# Altium PCB AGES_PBC.PcbDoc (part 1 of 2)
Units mm, origin at the board's own origin, x right, y up, seen from the top; angles counter-clockwise.
Board outline 190.75 x 141.73 mm, 2 copper layers (Top Layer, Bottom Layer), stack 1.671 mm thick; 38 components, 91 nets, 308 pads, 187 vias.
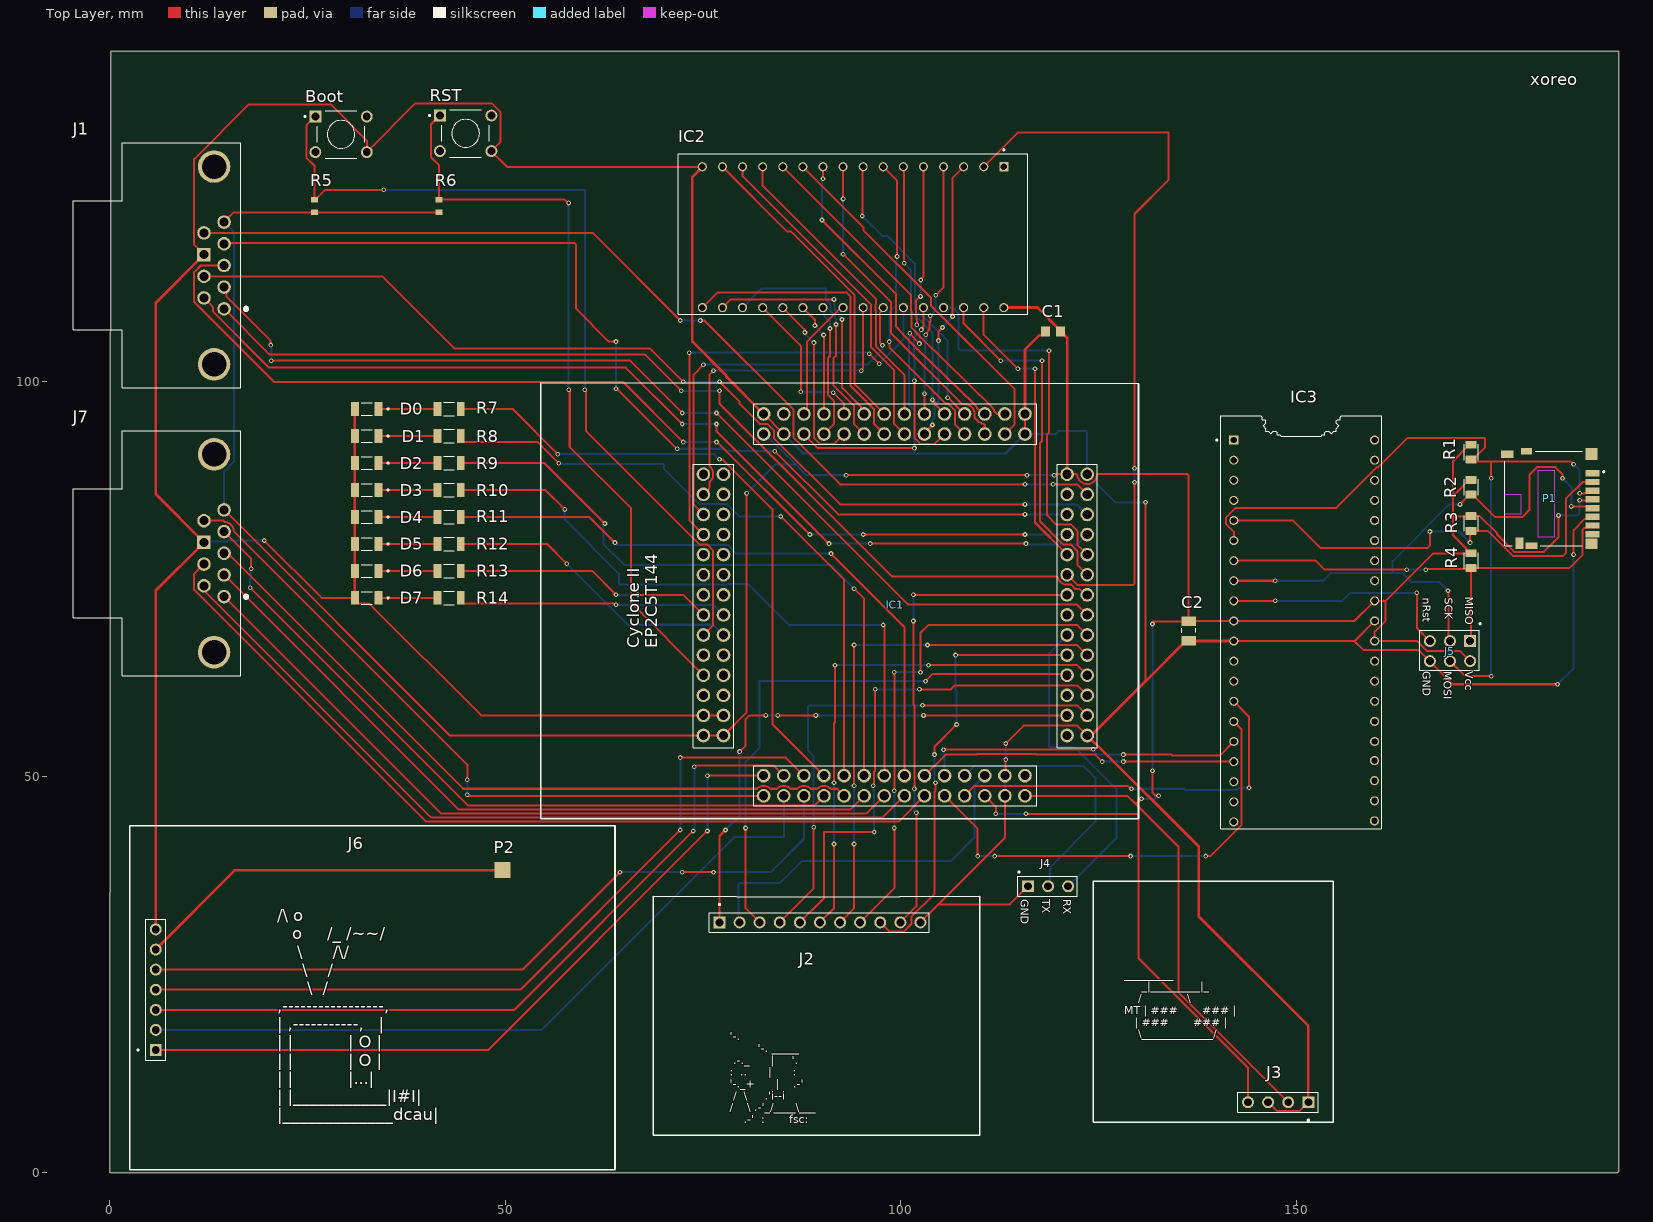
[diagram p0: Top Layer view]
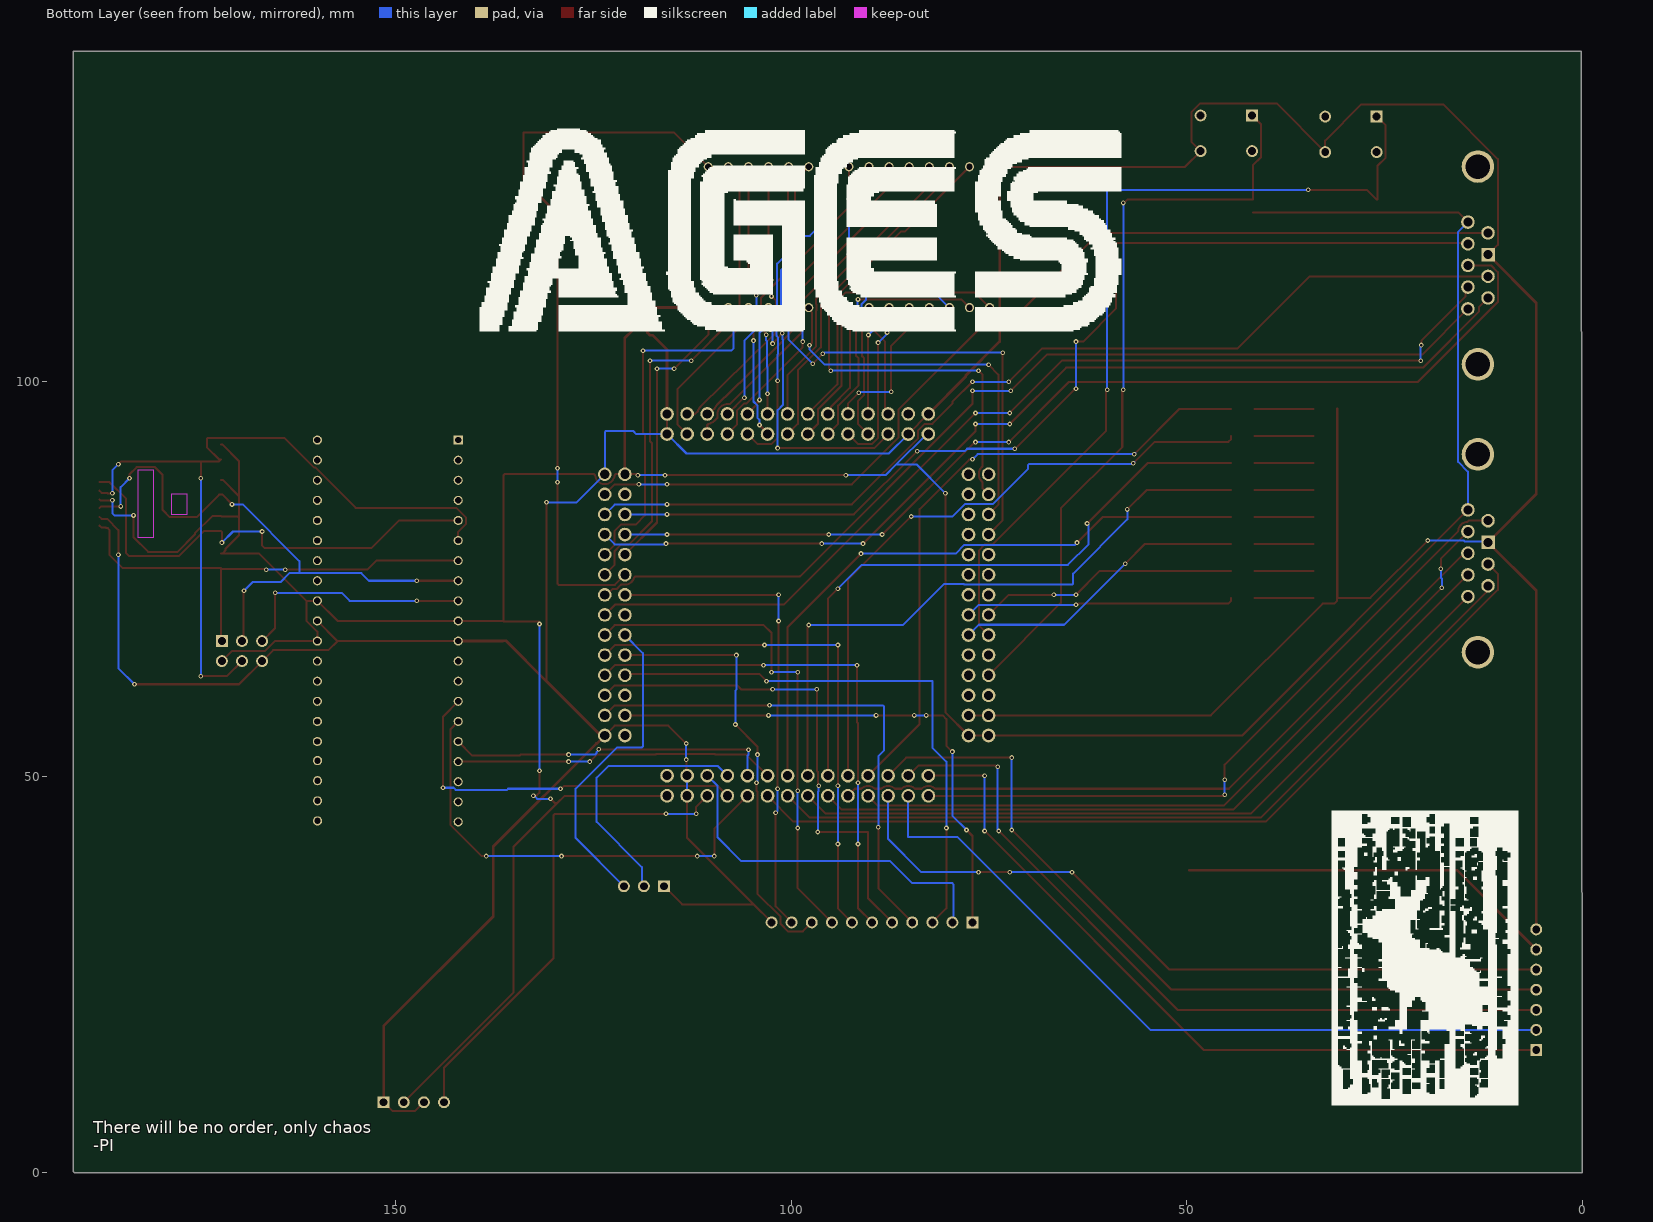
[diagram p1: Bottom Layer view, seen from below]
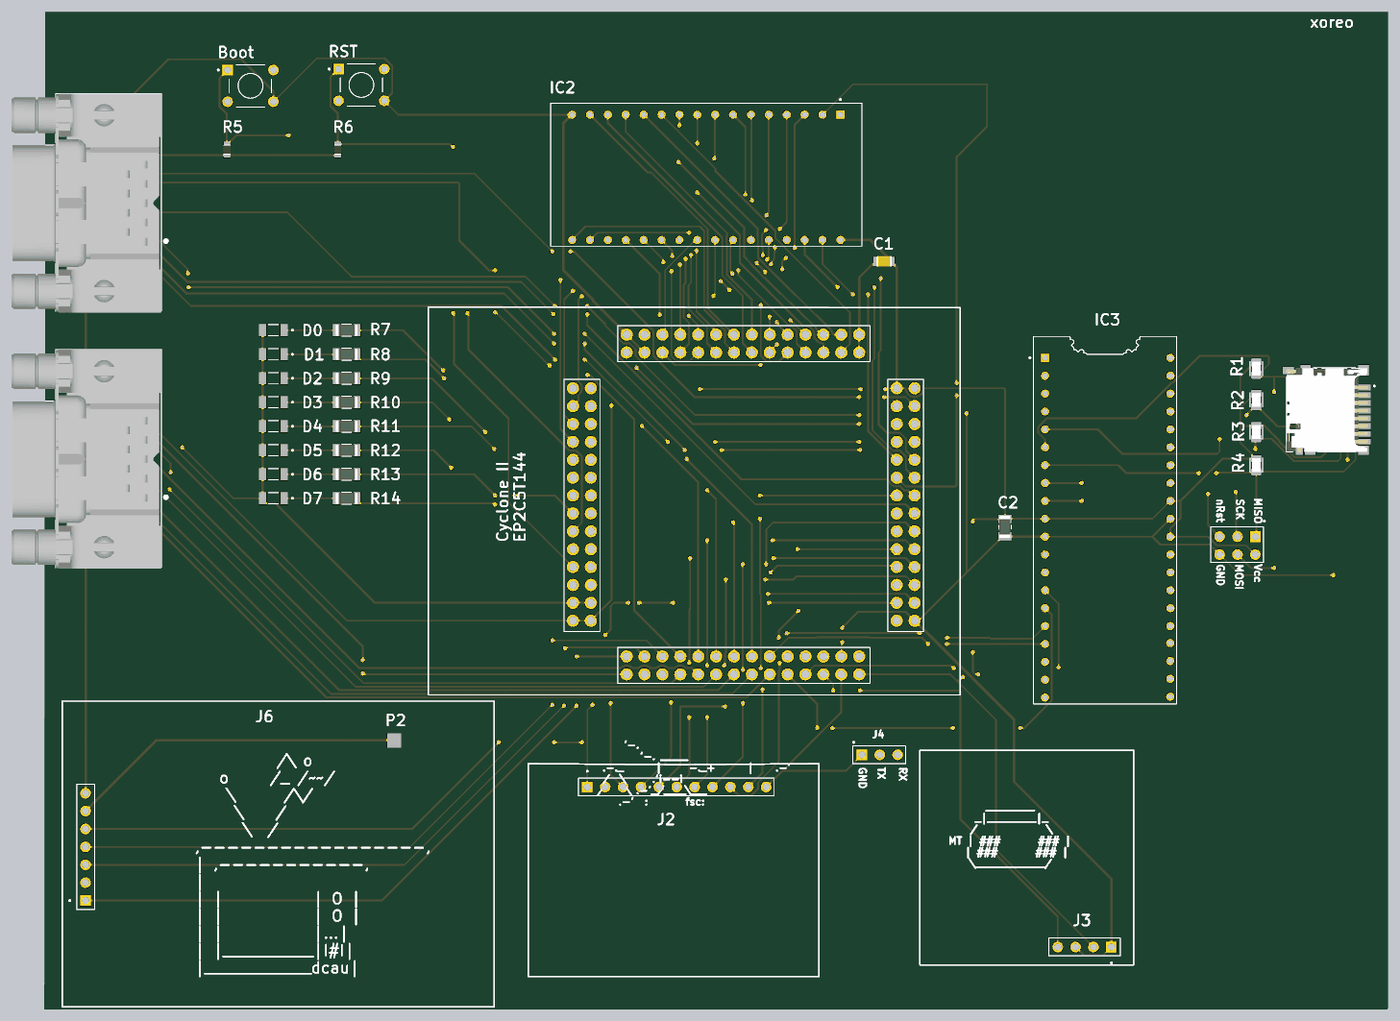
[diagram p2: 3D render of the assembled board from above, using the file's embedded part models]

## Layer stack, top to bottom
Top Solder: solder mask 0.0102, Solder Resist, Dk 3.5
Top Layer: signal copper 0.0356
Dielectric 1: dielectric 1.6, FR-4, Dk 4.8
Bottom Layer: signal copper 0.0356
Bottom Solder: solder mask 0.0102, Solder Resist, Dk 3.5

## Board outline
0,0 190.627,0 190.754,0.127 190.754,141.732 0.127,141.732

## Design rules (kind name [scope] priority, off if disabled: settings)
Clearance [All] p1: gap=0.254 ignorepadtopadclearanceinfootprint=FALSE except(0: Arc-Hole Track-Hole SMDPad-Hole THPad-Hole Via-Hole Fill-Hole Poly-Hole Region-Hole Text-Hole)
PolygonConnect [All] p1: connectstyle=Relief reliefconductorwidth=0.254 reliefentries=4 polygonreliefangle="90 Angle" airgapwidth=0.254
RoomDefinition RAMConnection [InComponentClass('RAMConnection')] p1: confinementstyle=ConfineIn formatcopy=TRUE lockcomponents=FALSE outline 67.818,102.616 122.301,102.616 122.301,130.429 67.818,130.429
RoomDefinition DebugLEDs [InComponentClass('DebugLEDs')] p2: confinementstyle=ConfineIn formatcopy=TRUE lockcomponents=FALSE outline 28.448,69.977 52.959,69.977 52.959,98.933 28.448,98.933
RoomDefinition CompositeConnection [InComponentClass('CompositeConnection')] p3: confinementstyle=ConfineIn formatcopy=TRUE lockcomponents=FALSE outline 3.175,13.716 7.62,13.716 7.62,35.179 3.175,35.179
RoomDefinition VGAConnection [InComponentClass('VGAConnection')] p4: confinementstyle=ConfineIn formatcopy=TRUE lockcomponents=FALSE outline 75.311,34.29 75.311,29.845 106.68,29.845 106.68,34.29
RoomDefinition SDConnection [InComponentClass('SDConnection')] p5: confinementstyle=ConfineIn formatcopy=TRUE lockcomponents=FALSE outline 134.102,42.926 189.103,42.926 189.103,98.679 134.102,98.679
RoutingVias [All] p1: holewidth=0.711 width=1.27 viastyle="Through Hole" minholewidth=0.711 minwidth=1.27 maxholewidth=0.711 maxwidth=1.27
SolderMaskExpansion [All] p1: expansion=0.102 istentingtop=FALSE
Width [All] p1: maxlimit=0.5 minlimit=0.254 preferedwidth=0.254 minimp=50.000000 maximp=50.000000 favimp=50.000000
30 further rules are at their usual default settings.

## Classes and differential pairs
component class VGAConnection: J2
component class SDConnection: C2 IC3 J5 P1 R1 R2 R3 R4
component class RAMConnection: C1 IC2
component class MainBoard: Boot IC1 J1 J3 J4 J7 P2 R5 R6 RST
component class DebugLEDs: D0 D1 D2 D3 D4 D5 D6 D7 R7 R8 R9 R10 R11 R12 R13 R14
component class CompositeConnection: J6

## Components (designator, comment, footprint, x,y, rotation, side; value= is the part's Value field where it differs from the comment)
Boot "Button" Button 26.012,133.477 r0 top
C1 "220nF" C0805C224K5RACTU 119.253,106.299 r0 top
C2 "100nF" "CAPACITOR 1206" 136.398,68.453 r270 top
D0 "LEDG" LEDC3216X120N 32.512,96.52 r180 top
D1 "LEDG" LEDC3216X120N 32.512,93.091 r180 top
D2 "LEDG" LEDC3216X120N 32.512,89.681 r180 top
D3 "LEDG" LEDC3216X120N 32.512,86.273 r180 top
D4 "LEDG" LEDC3216X120N 32.512,82.863 r180 top
D5 "LEDG" LEDC3216X120N 32.512,79.455 r180 top
D6 "LEDG" LEDC3216X120N 32.512,76.046 r180 top
D7 "LEDG" LEDC3216X120N 32.512,72.637 r180 top
IC1 "FPGA: CycloneII-EP2C5T144" "Cyclone II" 99.314,71.755 r90 top
IC2 "External memory DIP32" "DIP32 HDR" 113.03,127.127 r270 top
IC3 "ATmega 324 DIP" "DIP40 HDR" 150.993,68.453 r0 top
J1 "DB9 Sega controller connector" "DB9 Connector" 14.478,109.174 r270 top
J2 "VGA Pin HDR" "VGA HDR" 89.789,31.623 r0 top
J3 "4 pin header" "4 HDR" 147.701,8.89 r180 top
J4 "Connector: 1x3 Pin HDR" "3 HDR" 118.618,36.195 r0 top
J5 "2x3 male pin header" "2X3 HDR" 171.958,67.183 r180 top
J6 "Connector: 1x7 PIN HDR" "7 HDR" 7.112,32.004 r90 top
J7 "DB9 Sega controller connector" "DB9 Connector" 14.478,72.798 r270 top
P1 "SD slot DM3D" "SD SLOT" 187.445,85.186 r90 top
P2 "5VoltPad" 5VoltPad 49.657,38.227 r0 top
R1 "10K" "RESISTOR 0805" 172.085,91.059 r90 top
R2 "10K" "RESISTOR 0805" 172.085,86.614 r90 top
R3 "10K" "RESISTOR 0805" 172.085,82.042 r90 top
R4 "10K" "RESISTOR 0805" 172.085,77.343 r90 top
R5 "4K7 R" "Resistor 0603" 25.908,122.174 r270 top
R6 "4K7 R" "Resistor 0603" 41.656,122.174 r270 top
R7 "200R 1206" "Resistor 1206" 42.926,96.52 r180 top
R8 "200R 1206" "Resistor 1206" 42.926,93.091 r180 top
R9 "200R 1206" "Resistor 1206" 42.926,89.681 r180 top
R10 "200R 1206" "Resistor 1206" 42.926,86.273 r180 top
R11 "200R 1206" "Resistor 1206" 42.926,82.863 r180 top
R12 "200R 1206" "Resistor 1206" 42.926,79.455 r180 top
R13 "200R 1206" "Resistor 1206" 42.926,76.046 r180 top
R14 "200R 1206" "Resistor 1206" 42.926,72.637 r180 top
RST "Button" Button 41.76,133.604 r0 top

## Footprints (in the part's own frame and the unit in brackets; to place one, negate y for a bottom-side part, rotate by r counter-clockwise, add the part's x,y. Pads: shape width x height; smd on the part's side, far side on the other; paste and mask are expansions set on the pad)
"2X3 HDR" [mm] "2x3 pin header"
  rect 1.508x1.508 hole 1: 1(0,0)
  round 1.508 hole 1: 2(0,2.54) 3(2.54,0) 4(2.54,2.54) 5(5.08,0) 6(5.08,2.54)
  silkscreen extent -1.37,-2.29 6.35,3.66
"3 HDR" [mm] "1x3 pin header"
  rect 1.508x1.508 hole 1: 1(-2.54,0)
  round 1.508 hole 1: 2(0,0) 3(2.54,0)
  silkscreen extent -3.81,-1.27 3.68,1.88
"4 HDR" [mm] "1x4 pin header"
  rect 1.508x1.508 hole 1: 1(-3.81,0)
  round 1.508 hole 1: 2(-1.27,0) 3(1.27,0) 4(3.81,0)
  silkscreen extent -5.08,-1.27 5.08,2.35
5VoltPad [mm]
  rect 2x2 smd: 1(0,0)
"7 HDR" [mm] "1x7 pin header"
  rect 1.508x1.508 hole 1: 1(-16.51,1.27)
  round 1.508 hole 1: 2(-13.97,1.27) 3(-11.43,1.27) 4(-8.89,1.27) 5(-6.35,1.27) 6(-3.81,1.27) 7(-1.27,1.27)
  silkscreen extent -17.78,0 0,3.62
Button [mm]
  rect 1.498x1.498 / inner round 1.498 / far side rect 1.498x1.498 hole 0.99: 1(0,0)
  round 1.498 hole 0.99: 2(6.5,0) 3(0,-4.5) 4(6.5,-4.5)
  silkscreen extent -1.42,-5.25 6.24,0.74
C0805C224K5RACTU [mm] "C0805C224K5RACTU - 0805 SMD Capacitor"
  rect 1.1x1.3 smd: 1(-0.95,0) 2(0.95,0)
  body extent -1.1,-0.72 1.1,0.72, height 1.4
"CAPACITOR 1206" [mm] "100nF & 4.7pF"
  rect 1.16x1.82 smd: 1(-1.23,0) 2(1.23,0)
  silkscreen extent -0.32,-0.9 0.2,0.9, body extent -1.73,-0.8 1.47,0.8, height 0.85
"Cyclone II" [mm] "Cyclone II - EP2C5T144"
  round 1.725 hole 1.15: 1(16.51,24.257) 2(16.51,21.717) 3(13.97,24.257) 4(13.97,21.717) 5(11.43,24.257) 6(11.43,21.717) 7(8.89,24.257) 8(8.89,21.717) 9(6.35,24.257) 10(6.35,21.717) 11(3.81,24.257) 12(3.81,21.717) 13(1.27,24.257) 14(1.27,21.717) 15(-1.27,24.257) 16(-1.27,21.717) 17(-3.81,24.257) 18(-3.81,21.717) 19(-6.35,24.257) 20(-6.35,21.717) 21(-8.89,24.257) 22(-8.89,21.717) 23(-11.43,24.257) 24(-11.43,21.717) 25(-13.97,24.257) 26(-13.97,21.717) 27(-16.51,24.257) 28(-16.51,21.717) 29(-24.13,16.637) 30(-21.59,16.637) 31(-24.13,14.097) 32(-21.59,14.097) 33(-24.13,11.557) 34(-21.59,11.557) 35(-24.13,9.017) 36(-21.59,9.017) 37(-24.13,6.477) 38(-21.59,6.477) 39(-24.13,3.937) 40(-21.59,3.937) 41(-24.13,1.397) 42(-21.59,1.397) 43(-24.13,-1.143) 44(-21.59,-1.143) 45(-24.13,-3.683) 46(-21.59,-3.683) 47(-24.13,-6.223) 48(-21.59,-6.223) 49(-24.13,-8.763) 50(-21.59,-8.763) 51(-24.13,-11.303) 52(-21.59,-11.303) 53(-24.13,-13.843) 54(-21.59,-13.843) 55(-24.13,-16.383) 56(-21.59,-16.383) 57(16.51,-21.717) 58(16.51,-24.257) 59(13.97,-21.717) 60(13.97,-24.257) 61(11.43,-21.717) 62(11.43,-24.257) 63(8.89,-21.717) 64(8.89,-24.257) 65(6.35,-21.717) 66(6.35,-24.257) 67(3.81,-21.717) 68(3.81,-24.257) 69(1.27,-21.717) 70(1.27,-24.257) 71(-1.27,-21.717) 72(-1.27,-24.257) 73(-3.81,-21.717) 74(-3.81,-24.257) 75(-6.35,-21.717) 76(-6.35,-24.257) 77(-8.89,-21.717) 78(-8.89,-24.257) 79(-11.43,-21.717) 80(-11.43,-24.257) 81(-13.97,-21.717) 82(-13.97,-24.257) 83(-16.51,-21.717) 84(-16.51,-24.257) 85(24.13,16.637) 86(21.59,16.637) 87(24.13,14.097) 88(21.59,14.097) 89(24.13,11.557) 90(21.59,11.557) 91(24.13,9.017) 92(21.59,9.017) 93(24.13,6.477) 94(21.59,6.477) 95(24.13,3.937) 96(21.59,3.937) 97(24.13,1.397) 98(21.59,1.397) 99(24.13,-1.143) 100(21.59,-1.143) 101(24.13,-3.683) 102(21.59,-3.683) 103(24.13,-6.223) 104(21.59,-6.223) 105(24.13,-8.763) 106(21.59,-8.763) 107(24.13,-11.303) 108(21.59,-11.303) 109(24.13,-13.843) 110(21.59,-13.843) 111(24.13,-16.383) 112(21.59,-16.383)
  silkscreen extent -27.05,-30.73 28.07,44.83
"DB9 Connector" [mm] "DB9 Sega joystick connector"
  round 1.708 hole 1.14: 1(0,0) 2(-2.74,0) 3(-5.48,0) 4(-8.22,0) 5(-10.96,0) 6(-1.37,-2.54) 7(-4.11,-2.54) 9(-9.59,-2.54)
  rect 1.708x1.708 hole 1.14: 8(-6.85,-2.54)
  round 4.116 hole 3.1: S1(-17.98,-1.27) S2(7.02,-1.27)
  silkscreen extent -20.96,-19.07 10,2.97, body extent -20.93,-19.16 10.16,2.14, height 13.85
"DIP32 HDR" [mm]
  rect 1.15x1.15 / inner round 1.15 / far side rect 1.15x1.15 hole 0.8: 1(0,0)
  round 1.15 hole 0.8: 2(0,-2.54) 3(0,-5.08) 4(0,-7.62) 5(0,-10.16) 6(0,-12.7) 7(0,-15.24) 8(0,-17.78) 9(0,-20.32) 10(0,-22.86) 11(0,-25.4) 12(0,-27.94) 13(0,-30.48) 14(0,-33.02) 15(0,-35.56) 16(0,-38.1) 17(17.8,-38.1) 18(17.8,-35.56) 19(17.8,-33.02) 20(17.8,-30.48) 21(17.8,-27.94) 22(17.8,-25.4) 23(17.8,-22.86) 24(17.8,-20.32) 25(17.8,-17.78) 26(17.8,-15.24) 27(17.8,-12.7) 28(17.8,-10.16) 29(17.8,-7.62) 30(17.8,-5.08) 31(17.8,-2.54) 32(17.8,0)
  silkscreen extent -2.25,-41.15 18.67,3.05
"DIP40 HDR" [mm] "ATMega DIP40 socket"
  rect 1.15x1.15 / inner round 1.15 / far side rect 1.15x1.15 hole 0.8: 1(-8.9,24.13)
  round 1.15 hole 0.8: 2(-8.9,21.59) 3(-8.9,19.05) 4(-8.9,16.51) 5(-8.9,13.97) 6(-8.9,11.43) 7(-8.9,8.89) 8(-8.9,6.35) 9(-8.9,3.81) 10(-8.9,1.27) 11(-8.9,-1.27) 12(-8.9,-3.81) 13(-8.9,-6.35) 14(-8.9,-8.89) 15(-8.9,-11.43) 16(-8.9,-13.97) 17(-8.9,-16.51) 18(-8.9,-19.05) 19(-8.9,-21.59) 20(-8.9,-24.13) 21(8.88,-24.003) 22(8.88,-21.463) 23(8.88,-18.923) 24(8.88,-16.383) 25(8.9,-13.97) 26(8.9,-11.43) 27(8.9,-8.89) 28(8.9,-6.35) 29(8.9,-3.81) 30(8.9,-1.27) 31(8.9,1.27) 32(8.9,3.81) 33(8.9,6.35) 34(8.9,8.89) 35(8.9,11.43) 36(8.9,13.97) 37(8.9,16.51) 38(8.9,19.05) 39(8.9,21.59) 40(8.9,24.13)
  silkscreen extent -11.15,-25.02 9.77,27.18
LEDC3216X120N [mm]
  rect 1.01x1.73 smd: NEG(1.51,0) POS(-1.51,0)
  silkscreen extent -2.8,-0.8 0.68,0.8
"Resistor 0603" [mm] "PCF0603 SMD Resistor"
  rect 0.7x0.9 smd: 1(-0.8,0) 2(0.8,0)
  body extent -0.7,-0.5 0.7,0.5, height 0.65
"RESISTOR 0805" [mm]
  rrect25% 1x1.42 smd: 1(-0.935,0) 2(0.935,0)
  silkscreen extent -1,-0.89 1,0.89, body extent -1,-0.63 1,0.63, height 0.6
"Resistor 1206" [mm]
  rect 0.97x1.73 smd: 1(-1.48,0) 2(1.48,0)
  silkscreen extent -0.67,-0.85 0.67,0.85, body extent -1.55,-0.8 1.55,0.8, height 0.65
"SD SLOT" [mm]
  rect 0.8x1.75 smd: 1(3.2,0) 2(2.1,0) 3(1,0) 4(-0.1,0) 5(-1.2,0) 6(-2.3,0) 7(-3.4,0) 8(-4.5,0)
  rect 1.3x1.5 smd: S1(-5.7,0.125)
  rect 1.5x1.5 smd: S2(5.65,0.125)
  rect 0.8x1.5 smd: S3(-5.95,7.725)
  rect 0.8x1.4 smd: S4(6,8.375)
  rect 1x1.55 smd: SW-A(5.6,10.8)
  rect 1.45x1 smd: SW-B(-5.625,9.225)
  Keep-Out Layer region: 0.55,9.075 -1.95,9.075 -1.95,11.075 0.55,11.075
  Keep-Out Layer region: 3.6,4.875 -4.9,4.875 -4.9,6.875 3.6,6.875
  Keep-Out Layer region: 3.6,4.875 -4.9,4.875 -4.9,6.875 3.6,6.875
  Keep-Out Layer region: 0.55,9.075 -1.95,9.075 -1.95,11.075 0.55,11.075
  silkscreen extent -5.95,-1.5 6,11.07, body extent -5.98,-0.39 5.97,11.06, height 1.55
"VGA HDR" [mm] "1x11 pin header"
  rect 1.508x1.508 hole 1: 1(-12.7,0)
  round 1.508 hole 1: 2(-10.16,0) 3(-7.62,0) 4(-5.08,0) 5(-2.54,0) 6(0,0) 7(2.54,0) 8(5.08,0) 9(7.62,0) 10(10.16,0) 11(12.7,0)
  silkscreen extent -13.97,-1.27 13.84,2.35

## Part data
Boot RST: "50 mA SPST Round Actuator 160 Gram Force Tactile Pushbutton Switch", Package=None, Availability="In Stock", Check_prices=https://www.snapeda.com/parts/1825910-2/TE+Connectivity+ALCOSWITCH+Switches/view-part/?ref=eda, EU_RoHS_Compliance=Compliant, MF="TE Connectivity", MP=1825910-2, Price=None, Purchase-URL=https://pricing.snapeda.com/search/part/1825910-2/?ref=eda, SnapEDA_Link=https://www.snapeda.com/parts/1825910-2/TE+Connectivity+ALCOSWITCH+Switches/view-part/?ref=snap
C1: library part "Capacitor: 0.22µF", "0805 C 220nF Ceramic Multilayer Capacitor; 50 VDC; +125degC; X7R Dielec; +/-10%", Case Code (Imperial)=0805, Case Code (Metric)=2012, Dielectric=X7R, Dielectric Material=Ceramic, Manufacturer=KEMET, Manufacturer Part Number=C0805C224K5RACTU, Max Operating Temperature=125°C, Min Operating Temperature=-55°C, Package Quantity=1, Supplier Part Number 1=8029927, Tolerance=10%, Voltage=50V, Capacitance=220nF, Case/Package=0805, Category="Ceramic Capacitors", ComponentLink1Description=https://datasheet.ciiva.com/7842/kem-c1002-x7r-smd-7842582.pdf?src-supplier=Element14, ComponentLink1URL=https://datasheet.ciiva.com/7842/kem-c1002-x7r-smd-7842582.pdf?src-supplier=Element14, ComponentLink2Description=https://datasheet.ciiva.com/18193/getdatasheetpartid-304413-18193686.pdf?src-supplier=Verical, ComponentLink2URL=https://datasheet.ciiva.com/18193/getdatasheetpartid-304413-18193686.pdf?src-supplier=Verical, Construction=Flat, Depth=1.25mm, Dissipation Factor=2.5%, Height=1.1mm, Lead Pitch=0.75mm, Length=2mm, Mount="Surface Mount,PCB", Packaging="Tape and Reel", Pricing 1="500=0,04800, 2500=0,03900 (USD)", Radiation Hardening=No, REACH SVHC="No SVHC", RoHS=Yes, RoHS Compliant=Yes, Series=C, Stock 1=18500, Supplier 1=RSComponents, Termination=SMD/SMT, Thickness=0.055inch, Voltage Rating=50V, Voltage Rating (DC)=50V, Width=0.049inch
C2: library part "Capacitor: 100nF", "Ceramic capacitor SMD-1206 100nF /50V X7R# K +-10%, AVX, RoHS, /4000 reel/", Case Code (Imperial)=1206, Case Code (Metric)=3216, Dielectric=X7R, Dielectric Material=Ceramic, Insulation Resistance=100GR, Manufacturer="Kyocera AVX", Manufacturer Part Number=12065C104KAT2A, Max Operating Temperature=125°C, Min Operating Temperature=-55°C, Package Quantity=1, Supplier Part Number 1=2281081, Tolerance=10%, Voltage=50V, Capacitance=100nF, Case/Package=1206, Category="Ceramic Capacitors", ComponentLink1Description=https://datasheet.ciiva.com/11786/0900766b80ed4be2-11786988.pdf?src-supplier=Rs, ComponentLink1URL=https://datasheet.ciiva.com/11786/0900766b80ed4be2-11786988.pdf?src-supplier=Rs, ComponentLink2Description=https://datasheet.ciiva.com/2988/cx7r-2988135.pdf?src-supplier=Avnet, ComponentLink2URL=https://datasheet.ciiva.com/2988/cx7r-2988135.pdf?src-supplier=Avnet, ComponentLink3Description=https://datasheet.ciiva.com/16375/cx7r-16375719.pdf?src-supplier=Future+Electronics, ComponentLink3URL=https://datasheet.ciiva.com/16375/cx7r-16375719.pdf?src-supplier=Future+Electronics, ComponentLink4Description=https://datasheet.ciiva.com/2988/cx7r-2988136.pdf?src-supplier=Avnet, ComponentLink4URL=https://datasheet.ciiva.com/2988/cx7r-2988136.pdf?src-supplier=Avnet, ComponentLink5Description=https://datasheet.ciiva.com/7833/cx7r-7833405.pdf?src-supplier=Element14, ComponentLink5URL=https://datasheet.ciiva.com/7833/cx7r-7833405.pdf?src-supplier=Element14, ComponentLink6Description=https://datasheet.ciiva.com/25796/cx7r-25796358.pdf?src-supplier=Farnell, ComponentLink6URL=https://datasheet.ciiva.com/25796/cx7r-25796358.pdf?src-supplier=Farnell, ComponentLink7Description=https://datasheet.ciiva.com/7833/cx7r-7833402.pdf?src-supplier=Element14, ComponentLink7URL=https://datasheet.ciiva.com/7833/cx7r-7833402.pdf?src-supplier=Element14, ComponentLink8Description=https://datasheet.ciiva.com/150/cx7r-150390.pdf?src-supplier=Digi-Key, ComponentLink8URL=https://datasheet.ciiva.com/150/cx7r-150390.pdf?src-supplier=Digi-Key, ComponentLink9Description=https://datasheet.ciiva.com/150/cx7r-150389.pdf?src-supplier=Digi-Key, ComponentLink9URL=https://datasheet.ciiva.com/150/cx7r-150389.pdf?src-supplier=Digi-Key, ComponentLink10Description=https://datasheet.ciiva.com/150/cx7r-150391.pdf?src-supplier=Digi-Key, ComponentLink10URL=https://datasheet.ciiva.com/150/cx7r-150391.pdf?src-supplier=Digi-Key, ComponentLink11Description=https://datasheet.ciiva.com/7833/cx7r-7833403.pdf?src-supplier=Element14, ComponentLink11URL=https://datasheet.ciiva.com/7833/cx7r-7833403.pdf?src-supplier=Element14, ComponentLink12Description=https://datasheet.ciiva.com/7833/cx7r-7833404.pdf?src-supplier=Element14, ComponentLink12URL=https://datasheet.ciiva.com/7833/cx7r-7833404.pdf?src-supplier=Element14, ComponentLink13Description=https://datasheet.ciiva.com/5415/cx7r-218113-5415909.pdf?src-supplier=Mouser, ComponentLink13URL=https://datasheet.ciiva.com/5415/cx7r-218113-5415909.pdf?src-supplier=Mouser, ComponentLink14Description=https://datasheet.ciiva.com/14584/70001075-14584956.pdf?src-supplier=Allied+Electronics, ComponentLink14URL=https://datasheet.ciiva.com/14584/70001075-14584956.pdf?src-supplier=Allied+Electronics, Construction=Flat, Contact Plating=Tin,Matte, Depth=1.6mm, Dissipation Factor=2.5%, Height=0.94mm, Lead Free="Lead Free", Length=3.2mm, Mount="Surface Mount,PCB", Number of Pins=2, Packaging="Tape and Reel", Pricing 1="4000=0,02600, 20000=0,02520, 40000=0,02440 (EUR)", Radiation Hardening=No, Reach SVHC Compliant=Yes, RoHS=Yes, RoHS Compliant=Yes, Series=-, Stock 1=188000, Supplier 1=Farnell, Termination=SMD/SMT, Thickness=0.037inch, Voltage Rating=50V, Voltage Rating (DC)=50V, Width=1.6mm
D0 D1 D2 D3 D4 D5 D6 D7: library part LED, "LED Uni-Color SB. Green 565nm 2-Pin Chip LED T/R", Case/Package=3216, Color=Green, Forward Current=20mA, Forward Voltage=2.2V, Lens Color=Clear, Manufacturer=Kingbright, Manufacturer Part Number=KPT-3216SGC, Supplier Part Number 1=8610204P, Category=LEDs, ComponentLink1Description=https://datasheet.ciiva.com/23674/1563720-23674567.pdf?src-supplier=Newark, ComponentLink1URL=https://datasheet.ciiva.com/23674/1563720-23674567.pdf?src-supplier=Newark, Dominant Wavelength=568nm, Lens Style=Rectangular,Diffused,Colorless, Luminous Intensity=12mcd, Mount="Surface Mount", Number of LEDs=1, Number of Pins=2, Packaging="Tape and Reel", Pricing 1="100=0,14200, 500=0,13500, 1000=0,11800, 2000=0,10700, 8000=0,10500 (USD)", Radiation Hardening=No, REACH SVHC="No SVHC", RoHS=Yes, RoHS Compliant=Yes, Series=1206, Stock 1=1, Supplier 1=RSComponents, Viewing Angle=120°, Wavelength=568nm
IC2: library part "IC: AS6C1008", "AS6C1008 Series 1-Mbit (128 K x 8) 3 V 55 ns CMOS Static RAM - PDIP-32", Case/Package=PDIP, Manufacturer="Alliance Memory", Manufacturer Part Number=AS6C1008-55PCN, Max Operating Temperature=70°C, Max Supply Current=60mA, Max Supply Voltage=5.5V, Min Operating Temperature=0°C, Min Supply Voltage=2.7V, Operating Supply Voltage=3V, Package Quantity=13, Supplier Part Number 1=7444542, Temperature Grade=COMMERCIAL, Access Time=55ns, Access Time-Max=55ns, Address Bus Width=17b, Category=RAM, ComponentLink1Description=https://datasheet.ciiva.com/19457/1927457-19457052.pdf?src-supplier=Jameco, ComponentLink1URL=https://datasheet.ciiva.com/19457/1927457-19457052.pdf?src-supplier=Jameco, ComponentLink2Description=https://datasheet.ciiva.com/6877/32783-6877594.pdf?src-supplier=Newark, ComponentLink2URL=https://datasheet.ciiva.com/6877/32783-6877594.pdf?src-supplier=Newark, ComponentLink3Description=https://datasheet.ciiva.com/18617/as6c1008feb2007-18617960.pdf?src-supplier=Digi-Key, ComponentLink3URL=https://datasheet.ciiva.com/18617/as6c1008feb2007-18617960.pdf?src-supplier=Digi-Key, ComponentLink4Description=https://datasheet.ciiva.com/1510/32783-1510620.pdf?src-supplier=Element14, ComponentLink4URL=https://datasheet.ciiva.com/1510/32783-1510620.pdf?src-supplier=Element14, ComponentLink5Description=https://datasheet.ciiva.com/3201/as6c1008feb2007-3201030.pdf?src-supplier=Avnet, ComponentLink5URL=https://datasheet.ciiva.com/3201/as6c1008feb2007-3201030.pdf?src-supplier=Avnet, ComponentLink6Description=https://datasheet.ciiva.com/16208/as6c1008feb2007-16208749.pdf?src-supplier=Future+Electronics, ComponentLink6URL=https://datasheet.ciiva.com/16208/as6c1008feb2007-16208749.pdf?src-supplier=Future+Electronics, Density=1Mb, Height=3.81mm, Interface=Parallel, Lead Free="Lead Free", Length=41.91mm, Memory Size=1Mb, Memory Type="RAM,SRAM - Asynchronous,SDR", Mount="Through Hole", Number of Pins=32, Number of Ports=1, Number of Words=128000, Packaging=Rail/Tube, Pricing 1="1=4,11000, 5=3,49000, 10=3,39000, 25=3,28000, 50=3,20000 (EUR)", Radiation Hardening=No, Reach SVHC Compliant=Yes, RoHS=Yes, RoHS Compliant=Yes, Series=AS6C1008, Stock 1=774, Supplier 1=Rs, Supply Voltage-Nom=3V, Weight=0.078125oz, Width=13.818mm
IC3: library part "IC: ATmega324", "8-bit AVR MCU, 32 KB, 2048 Bytes, 20 MHz, 1.8 to 5.5V, PDIP-40, RoHS", Case/Package=PDIP, Frequency=20MHz, Manufacturer=Microchip, Manufacturer Part Number=ATMEGA324PA-PU, Max Operating Temperature=85°C, Max Supply Voltage=5.5V, Min Operating Temperature=-40°C, Min Supply Voltage=1.8V, Package Quantity=10, Supplier Part Number 1=1715485, Category=Uncategorized, ComponentLink1Description=https://datasheet.ciiva.com/1157/atmel-8272-8-bit-avr-microcontroller-atmega164a-pa-324a-pa-644a-pa-1284-p-summary-1157584.pdf?src-supplier=Element14, ComponentLink1URL=https://datasheet.ciiva.com/1157/atmel-8272-8-bit-avr-microcontroller-atmega164a-pa-324a-pa-644a-pa-1284-p-summary-1157584.pdf?src-supplier=Element14, ComponentLink2Description=https://datasheet.ciiva.com/9234/doc8272-9234746.pdf?src-supplier=Avnet, ComponentLink2URL=https://datasheet.ciiva.com/9234/doc8272-9234746.pdf?src-supplier=Avnet, Contact Plating=Tin,Matte, Core Architecture=AVR, Data Bus Width=8b, Height=4.445mm, Interface=I2C,SPI,UART,USART,2-Wire, Length=52.58mm, Max Frequency=20MHz, Memory Size=32KB, Memory Type=FLASH, Mount="Through Hole", Number of ADC Channels=8, Number of I2C Channels=1, Number of I/Os=32, Number of Pins=40, Number of Programmable I/O=32, Number of PWM Channels=6, Number of SPI Channels=1, Number of Timers/Counters=3, Oscillator Type=Internal, Packaging=Rail/Tube, Peripherals="Brown-out Detect/Reset,POR,PWM,WDT", Pricing 1="1=5,70000, 25=5,22000, 100=5,13000 (EUR)", RAM Size=2KB, Reach SVHC Compliant=Yes, RoHS=Yes, RoHS Compliant=Yes, Series="AVR® ATmega", Stock 1=132, Supplier 1=Farnell, Watchdog Timer=Yes, Width=13.97mm
J1 J7: library part "Connector: DB9", "9 Way Right Angle Through Hole PCB D-sub Connector Socket; 2.77mm; 2.84mm Pitch", Current Rating=3A, Manufacturer="Wurth Electronics", Manufacturer Part Number=618009231321, Max Operating Temperature=85°C, Min Operating Temperature=-40°C, Supplier Part Number 1=1841197, Voltage Rating=125V, Category="D-Sub Connectors", ComponentLink1Description=https://datasheet.ciiva.com/25605/0900766b81191772-25605489.pdf?src-supplier=Rs, ComponentLink1URL=https://datasheet.ciiva.com/25605/0900766b81191772-25605489.pdf?src-supplier=Rs, ComponentLink2Description=https://datasheet.ciiva.com/12669/6180xx231321-12669192.pdf?src-supplier=Mouser, ComponentLink2URL=https://datasheet.ciiva.com/12669/6180xx231321-12669192.pdf?src-supplier=Mouser, Contact Material="Copper Alloy", Contact Plating=Gold, Depth=20.75mm, Gender=Female, Housing Material=Steel, Lead Free="Lead Free", Length=30.8mm, Mount="Through Hole", Number of Contacts=9, Number of Rows=2, Orientation="Right Angle", Pitch=2.84mm, Pricing 1="1=3,44000, 10=2,90000, 100=2,52000, 250=2,17000, 500=1,93000, 1000=1,89000 (EUR)", RoHS=Yes, RoHS Compliant=Yes, Series=618, Stock 1=287, Supplier 1=Farnell, Termination=SMD/SMT, Width=12.5mm
J2: library part "Connector: VGA HDR", "VGA pin male header"
J3: library part "Connector: 4 pin header", "Male 4 pin header"
J5: library part "Connector: 2x3 Pin", "2x3 Pin header"
J6: "7 pin header"
P1: library part "SD slot", "Memory Card Connectors MICRO SD CD CONN STD SMT PUSHPULL", Contact Resistance=100mR, Current Rating=500mA, Flammability Rating="UL94 V-0", Insulation Resistance=1GR, Manufacturer=Hirose, Manufacturer Part Number=DM3D-SF, Max Operating Temperature=85°C, Max Voltage Rating (AC)=125V, Min Operating Temperature=-25°C, Package Quantity=1, Supplier Part Number 1=1764377, Category="Memory Connectors", ComponentLink1Description=https://datasheet.ciiva.com/1105/1697167-1105105.pdf?src-supplier=Element14, ComponentLink1URL=https://datasheet.ciiva.com/1105/1697167-1105105.pdf?src-supplier=Element14, ComponentLink2Description=https://datasheet.ciiva.com/11755/0900766b80fd13c1-11755152.pdf?src-supplier=Rs, ComponentLink2URL=https://datasheet.ciiva.com/11755/0900766b80fd13c1-11755152.pdf?src-supplier=Rs, ComponentLink3Description=https://datasheet.ciiva.com/16287/e60900232-16287615.pdf?src-supplier=Future+Electronics, ComponentLink3URL=https://datasheet.ciiva.com/16287/e60900232-16287615.pdf?src-supplier=Future+Electronics, ComponentLink4Description=https://datasheet.ciiva.com/15174/getdatasheetpartid-432464-15174822.pdf?src-supplier=Verical, ComponentLink4URL=https://datasheet.ciiva.com/15174/getdatasheetpartid-432464-15174822.pdf?src-supplier=Verical, ComponentLink5Description=https://datasheet.ciiva.com/3122/e60900232-3122537.pdf?src-supplier=Avnet, ComponentLink5URL=https://datasheet.ciiva.com/3122/e60900232-3122537.pdf?src-supplier=Avnet, ComponentLink6Description=https://datasheet.ciiva.com/683/e60900232-683362.pdf?src-supplier=Digi-Key, ComponentLink6URL=https://datasheet.ciiva.com/683/e60900232-683362.pdf?src-supplier=Digi-Key, ComponentLink7Description=https://datasheet.ciiva.com/683/e60900232-683363.pdf?src-supplier=Digi-Key, ComponentLink7URL=https://datasheet.ciiva.com/683/e60900232-683363.pdf?src-supplier=Digi-Key, ComponentLink8Description=https://datasheet.ciiva.com/683/e60900232-683364.pdf?src-supplier=Digi-Key, ComponentLink8URL=https://datasheet.ciiva.com/683/e60900232-683364.pdf?src-supplier=Digi-Key, ComponentLink9Description=https://datasheet.ciiva.com/22627/1697167-22627974.pdf?src-supplier=Farnell, ComponentLink9URL=https://datasheet.ciiva.com/22627/1697167-22627974.pdf?src-supplier=Farnell, Connector Type=Connector, Contact Material="Copper Alloy,Copper", Contact Plating=Gold, Depth=11.45mm, Gender=Female, Housing Material=Polymer, Lead Free="Lead Free", Length=11.95mm, Max Current Rating=500mA, Mount="Surface Mount", Number of Contacts=8, Number of Rows=1, Orientation="Right Angle", Packaging="Tape and Reel", Pitch=1.1mm, Pricing 1="1=1,80000, 10=1,48000, 100=1,28000, 500=1,18000, 1000=0,93700, 2500=0,91800 (EUR)", Radiation Hardening=No, Reach SVHC Compliant=Yes, RoHS=Yes, RoHS Compliant=Yes, Series=DM3, Stock 1=7247, Supplier 1=Farnell, Termination=Solder, Voltage Rating (AC)=125V, Width=11.95mm
R1 R2 R3 R4: library part "Resistor: 10K R", "Res Thick Film 0805 10K Ohm 5% 1/8W ±200ppm/°C Molded SMD SMD Paper T/R", Case Code (Imperial)=0805, Case Code (Metric)=2012, Manufacturer="Vishay Dale", Manufacturer Part Number=CRCW080510K0JNEB, Max Operating Temperature=155°C, Max Power Dissipation=125mW, Min Operating Temperature=-55°C, Package Quantity=10000, Resistance=10kR, Resistance Tolerance=5%, Resistor Type="Thick Film", Temperature Coefficient=200ppm/°C, Voltage Rating=150V, Case/Package=0805, Category="Chip SMD Resistors", ComponentLink1Description=https://datasheet.ciiva.com/16199/dcrcwe3-16199191.pdf?src-supplier=Future+Electronics, ComponentLink1URL=https://datasheet.ciiva.com/16199/dcrcwe3-16199191.pdf?src-supplier=Future+Electronics, ComponentLink2Description=https://datasheet.ciiva.com/7725/dcrcwe3-7725772.pdf?src-supplier=Element14, ComponentLink2URL=https://datasheet.ciiva.com/7725/dcrcwe3-7725772.pdf?src-supplier=Element14, ComponentLink3Description=https://datasheet.ciiva.com/3258/dcrcwe3-3258030.pdf?src-supplier=Avnet, ComponentLink3URL=https://datasheet.ciiva.com/3258/dcrcwe3-3258030.pdf?src-supplier=Avnet, Construction=Rectangular, Contact Plating=Tin, Depth=1.25mm, Features="Automotive AEC-Q200", Height=0.02inch, Lead Free="Lead Free", Length=0.079inch, Military Standard=Not, Number of Terminations=2, Packaging="Tape and Reel", Power Rating=125mW, Pricing 1="10000=0,02220, 20000=0,02100, 40000=0,01980, 60000=0,01860, 80000=0,01740, 100000=0,01620, 1000000=0,01500 (USD)", Radiation Hardening=No, RoHS=Yes, RoHS Compliant=Yes, Series=CRCW, Stock 1=90000, Supplier 1=Avnet, Supplier Part Number 1=CRCW080510K0JNEB, Technology="THICK FILM", Termination=SMD/SMT, Tolerance=5%, Voltage Rating (DC)=150V, Weight=0.000194oz, Width=1.25mm, Working Voltage=150V
R5 R6: library part "Resistor: 4K7", "Surface Mount Metal Film Resistor, Pcf Series, 4.7 Kohm, 63 Mw, - 0.1%, 75 V Rohs Compliant: Yes", Case Code (Imperial)=0603, Case Code (Metric)=1608, Manufacturer="TT Welwyn", Manufacturer Part Number=PCF0603P-R-4K7-BT1, Power Rating=63mW, Resistance=4.7kR, Resistor Type="Thin Film", Supplier Part Number 1=61M8292, Temperature Coefficient=25ppm/°C, Tolerance=0.1%, Voltage Rating=75V, Case/Category=0603, Category="Chip SMD Resistors", ComponentLink1Description=https://datasheet.ciiva.com/7860/3754-7860191.pdf?src-supplier=Element14, ComponentLink1URL=https://datasheet.ciiva.com/7860/3754-7860191.pdf?src-supplier=Element14, ComponentLink2Description=https://datasheet.ciiva.com/6093/3754-6093381.pdf?src-supplier=Farnell, ComponentLink2URL=https://datasheet.ciiva.com/6093/3754-6093381.pdf?src-supplier=Farnell, Packaging="Cut Tape", Pricing 1="10=0,17900 (USD)", REACH SVHC="No SVHC", RoHS=Yes, Stock 1=1027, Supplier 1=Newark, Voltage Rating (DC)=75V
R7 R8 R9 R10 R11 R12 R13 R14: library part "Resistor: 200R", "Surface Mount Thick Film Resistor, AEC-Q200 ERJ Series, 200 ohm, 250 mW, - 1%, 200 V", Case Code (Imperial)=1206, Case Code (Metric)=3216, Current Rating=2A, Manufacturer=Panasonic, Manufacturer Part Number=ERJ-U08F2000V, Max Operating Temperature=155°C, Min Operating Temperature=-55°C, Package Quantity=5000, Power Rating=250mW, Resistance=200R, Resistance Tolerance=1%, Resistor Type="Thick Film", Supplier Part Number 1=1723988, Temperature Coefficient=100ppm/°C, Voltage Rating=200V, Case/Package=1206, Category="Chip SMD Resistors", ComponentLink1Description=https://datasheet.ciiva.com/7891/1638979-7891542.pdf?src-supplier=Element14, ComponentLink1URL=https://datasheet.ciiva.com/7891/1638979-7891542.pdf?src-supplier=Element14, ComponentLink2Description=https://datasheet.ciiva.com/24195/ras-erj-u-267552-24195551.pdf?src-supplier=Mouser, ComponentLink2URL=https://datasheet.ciiva.com/24195/ras-erj-u-267552-24195551.pdf?src-supplier=Mouser, Depth=1.6mm, Height=0.6mm, Length=3.2mm, Packaging="Tape and Reel", Pricing 1="4000=0,04900 (EUR)", Reach SVHC Compliant=Yes, RoHS=Yes, RoHS Compliant=Yes, Series=ERJ-U08, Stock 1=6900, Supplier 1=Rs, Technology="THICK FILM", Termination=SMD/SMT, Tolerance=1%, Voltage Rating (DC)=200V, Weight=0.000571oz, Width=1.6mm

## Via types
v1: diameter 0.6, hole 0.3, Top Layer to Bottom Layer, 187 vias

## Nets (pads, with @x,y where several pads share a name; then routed paths per layer and width w, separated by ;. In a path a pad name is that pad's centre, name@x,y a point inside that pad or via, vN(x,y) a via of type N, cw(c..) or ccw(c..) an arc to the next point about the centre after c; other vN are vias at no path point)
3v: C1.2 C2.1 IC1.27 IC1.28 IC1.55 IC1.57 IC1.86 IC2.32 IC3.10 IC3.30 IC3.32 J1.5 J3.2 J5.2 J7.5 P1.4 R1.2 R2.2 R3.2 R4.2 R5.2 R6.2 | length 474.5
  Top Layer w0.254: J7.5 42.991,55.245 IC1.27 IC1.28 80.518,58.166 v1(80.518,85.852) ; J1.5 15.718,121.374 R5.2 R6.2 ; v1(93.091,88.138) v1(115.951,88.138) ; IC1.55 128.651,47.625 129.54,46.736 ; v1(119.38,88.138) 119.507,88.265 IC1.57 122.2,88.265 122.275,88.191 122.335,88.131 ccw(c123.571,88.265) 124.807,88.131 124.867,88.191 124.942,88.265 136.249,88.265 136.324,88.191 136.398,88.116 C2.1 ; v1(130.429,47.244) 129.921,46.736 129.54,46.736 ; v1(131.826,50.8) 131.826,48.006 132.14,47.691 132.522,47.691 v1(132.588,47.625) ; v1@131.826,69.596 131.913,69.683 C2.1 ; J3.2 135.128,22.733 135.128,41.148 129.54,46.736 ; J5.2 170.654,65.947 166.509,65.947 165.273,67.183 IC3.30 159.893,68.371 161.29,69.768 161.29,72.263 ; R4.2 R4.2@171.875,78.278 ; R2.2 171.875,87.549 169.799,85.473 ; R1.2 171.875,91.994 169.799,89.918 169.799,85.473 ; v1(183.134,83.058) 183.134,80.311 181.278,78.455 177.562,78.455 175.369,80.648 175.369,80.784 173.176,82.977 R3.2 172.039,82.931 169.948,82.931 169.799,82.782 ; v1(185.801,84.963) 187.322,84.963 P1.4 ; C2.1 136.438,69.723 IC3.10 157.353,69.723 IC3.32 161.29,72.263 ; 161.29,72.263 167.305,78.278 R4.2@171.875,78.278 ; 169.799,82.782 169.799,80.564 171.502,78.861 171.502,78.651 R4.2@171.875,78.278 ; 169.799,82.782 169.799,85.473
  Top Layer w0.35: IC2.32 117.275,109.327 120.203,106.399 C1.2 120.928,105.574 121.031,105.471 IC1.57
  Bottom Layer w0.254: J7.5 14.478,88.599 15.713,89.834 15.713,118.899 J1.5 ; IC1.28@77.47,55.372 IC1.28 ; v1(80.518,85.852) 84.175,89.509 86.715,89.509 ; IC1.86 82.878,93.345 86.715,89.509 ; v1(93.091,88.138) 88.085,88.138 86.715,89.509 ; v1(115.951,88.138) v1(119.38,88.138) ; v1(130.429,47.244) 132.113,47.244 132.494,47.625 v1(132.588,47.625) ; v1(131.826,50.8) v1(131.826,69.342) ; v1(183.134,83.058) 185.547,83.058 185.801,83.312 v1(185.801,84.963)
+5: J6.6 P2.1 | length 48
  Top Layer w0.35: J6.6 15.875,38.227 P2.1
GND: Boot.4 C1.1 C2.2 D0.NEG D1.NEG D2.NEG D3.NEG D4.NEG D5.NEG D6.NEG D7.NEG IC1.25 IC1.26 IC1.53 IC1.54 IC1.58 IC1.84 IC1.85 IC1.88 IC1.111 IC1.112 IC2.16 IC3.11 IC3.31 J1.8 J2.11 J3.1 J3.3 J4.1 J5.6 J6.7 J7.8 P1.6 RST.4 | length 625.3
  Top Layer w0.254: J1.8 10.703,117.259 10.703,128.098 17.606,135.001 27.94,135.001 32.512,130.429 Boot.4 38.663,135.128 48.334,135.128 49.39,134.072 49.39,130.234 RST.4 50.237,127.127 IC2.16 ; v1(19.558,79.883) 26.804,72.637 D7.NEG 31.002,72.277 31.38,71.899 32.851,71.899 46.965,57.785 IC1.25 IC1.26 ; IC1.85 IC1.88 ; J2.11 104.775,33.909 ; IC1.53 113.157,42.291 104.775,33.909 ; IC1.54 113.221,50.228 113.221,52.133 v1(113.284,52.197) ; v1(113.284,54.229) 115.544,56.489 122.327,56.489 IC1.84 ; IC1.112 IC1.111 ; J4.1 113.792,33.909 104.775,33.909 ; 130.879,62.034 130.937,62.092 v1(130.937,84.709) ; IC3.11 157.353,67.183 ; J3.3 147.566,7.755 150.376,7.755 J3.1 ; IC3.31 157.353,67.183 ; v1(183.007,61.722) 169.799,61.722 J5.6 165.488,66.033 158.503,66.033 157.353,67.183 ; v1(185.039,78.105) 185.039,81.194 186.458,82.613 187.172,82.613 P1.6
  Top Layer w0.35: J6.7 5.842,73.552 J7.8 5.842,85.744 5.842,109.928 J1.8 ; D7.NEG D6.NEG D5.NEG D4.NEG D3.NEG D2.NEG D1.NEG D0.NEG ; IC2.16 73.66,125.857 73.66,105.044 77.944,100.76 77.944,100.618 IC1.85 ; IC1.111 115.697,104.013 117.528,105.844 117.88,105.844 118.193,106.157 118.193,106.509 118.413,106.509 C1.1@118.726,106.822 ; 130.879,62.034 124.371,55.526 123.852,55.526 IC1.84 124.574,54.242 124.635,54.242 137.668,41.209 137.668,32.385 151.511,18.542 J3.1 ; 130.937,62.092 136.068,67.223 C2.2 136.438,67.183 IC3.11
  Bottom Layer w0.254: J7.8 12.073,79.783 14.886,79.783 14.986,79.883 v1(19.558,79.883) ; IC1.88 87.676,90.886 113.238,90.886 IC1.112 119.568,93.345 119.949,93.726 123.422,93.726 123.571,93.577 IC1.58 127.127,84.709 v1(130.937,84.709) ; IC1.53 IC1.54 ; v1@113.284,52.451 v1(113.284,54.229) ; v1(183.007,61.722) 185.039,63.754 v1(185.039,78.105)
NetBoot_1: Boot.1 IC1.17 R5.1 | length 110.2
  Top Layer w0.254: Boot.1 24.882,132.347 24.882,128.285 25.908,127.259 R5.1 26.008,122.974 27.24,124.206 v1(34.671,124.206) ; v1@60.198,99.06 60.198,93.745 74.542,79.401 75.519,79.401 76.301,78.62 76.301,69.189 IC1.17
  Bottom Layer w0.254: v1(34.671,124.206) 60.071,124.206 v1(60.071,98.933)
NetD0_POS: D0.POS R7.2 | length 7.4
  Top Layer w0.254: D0.POS R7.2
NetD1_POS: D1.POS R8.2 | length 7.4
  Top Layer w0.254: D1.POS R8.2
NetD2_POS: D2.POS R9.2 | length 7.4
  Top Layer w0.254: D2.POS R9.2
NetD3_POS: D3.POS R10.2 | length 7.4
  Top Layer w0.254: D3.POS R10.2
NetD4_POS: D4.POS R11.2 | length 7.4
  Top Layer w0.254: D4.POS R11.2
NetD5_POS: D5.POS R12.2 | length 7.4
  Top Layer w0.254: D5.POS R12.2
NetD6_POS: D6.POS R13.2 | length 7.4
  Top Layer w0.254: D6.POS R13.2
NetD7_POS: D7.POS R14.2 | length 7.4
  Top Layer w0.254: D7.POS R14.2
NetIC1_3: IC1.3 IC2.25 | length 43.2
  Top Layer w0.254: IC1.3 75.819,86.487 75.819,87.27 75.893,87.344 75.897,87.348 ccw(c75.057,88.265) 75.897,89.182 75.893,89.185 75.819,89.26 75.819,100.838 v1(76.327,101.346) ; v1(94.996,101.346) 94.996,101.44 95.25,101.694 IC2.25
  Bottom Layer w0.254: v1(76.327,101.346) v1(94.996,101.346)
NetIC1_5: IC1.5 IC2.26 | length 49
  Top Layer w0.254: IC1.5 73.813,84.429 73.813,100.864 v1(75.057,102.108) ; v1(97.7,104.558) 97.7,104.589 97.409,104.88 97.409,108.73 97.79,109.111 IC2.26
  Bottom Layer w0.254: v1(75.057,102.108) 95.758,102.108 97.7,104.05 v1(97.7,104.558)
NetIC1_7: IC1.7 IC2.27 | length 56.7
  Top Layer w0.254: v1(73.279,103.632) 73.279,82.423 IC1.7 ; v1(96.012,103.505) v1(97.282,102.235)
  Bottom Layer w0.254: v1(73.279,103.632) 95.791,103.632 95.918,103.505 v1(96.012,103.505) ; v1(97.282,102.235) 100.33,105.283 IC2.27
NetIC1_15: IC1.15 R13.1 | length 33
  Top Layer w0.254: R13.1 60.987,76.046 v1(64.008,73.025) ; v1(66.802,73.025) 72.517,73.025 IC1.15
  Bottom Layer w0.254: v1(64.008,73.025) v1(66.802,73.025)
NetIC1_16: IC1.16 R14.1 | length 34.3
  Top Layer w0.254: R14.1 44.406,72.257 44.764,71.899 63.77,71.899 63.914,71.755 v1(64.008,71.755)
  Bottom Layer w0.254: v1(64.008,71.755) 76.327,71.755 IC1.16
NetIC1_18: IC1.18 R12.1 | length 38
  Top Layer w0.254: R12.1 55.292,79.455 v1(57.785,76.962)
  Bottom Layer w0.254: v1(57.785,76.962) 65.506,69.241 76.301,69.241 IC1.18
NetIC1_21: IC1.21 R6.1 RST.1 | length 94.6
  Top Layer w0.254: RST.1 40.63,132.474 40.63,128.348 41.656,127.322 R6.1 57.526,122.974 57.945,122.555 v1(58.039,122.555) ; v1@58.166,98.806 58.166,91.694 65.913,83.947 65.913,72.009 IC1.21
  Bottom Layer w0.254: v1(58.039,98.933) v1(58.039,122.555)
NetIC1_29: IC1.29 J7.9 | length 87.5
  Top Layer w0.254: J7.9 14.386,82.388 14.522,82.252 cw(c14.478,81.018) 15.712,81.062 45.212,51.562 v1(45.212,49.657) ; v1(45.212,47.752) 45.339,47.625 IC1.29
  Bottom Layer w0.254: v1(45.212,47.752) v1(45.212,49.657)
NetIC1_30: IC1.30 J6.1 | length 95.3
  Top Layer w0.254: J6.1 47.879,15.494 v1(75.565,43.18) ; v1(75.565,50.165) IC1.30
  Bottom Layer w0.254: v1(75.565,43.18) v1(75.565,50.165)
NetIC1_31: IC1.31 J6.2 | length 94.7
  Bottom Layer w0.254: J6.2 54.61,18.034 79.016,42.44 85.217,42.44 IC1.31
NetIC1_32: IC1.32 J6.3 | length 96.9
  Top Layer w0.254: J6.3 51.181,20.574 v1(73.787,43.18) ; v1@74.168,51.435 83.947,51.435 IC1.32
  Bottom Layer w0.254: v1@73.914,43.307 v1(73.914,51.308)
NetIC1_33: IC1.33 J6.5 | length 94.2
  Top Layer w0.254: J6.5 52.197,25.654 v1(64.516,37.973) ; v1(72.39,37.973) v1(76.327,37.973)
  Bottom Layer w0.254: v1(64.516,37.973) v1(72.39,37.973) ; v1(76.327,37.973) 83.566,37.973 87.757,42.164 IC1.33
NetIC1_34: IC1.34 J6.4 | length 100.4
  Top Layer w0.254: J6.4 51.943,23.114 v1(72.136,43.307) ; v1(72.136,52.451) 85.471,52.451 IC1.34
  Bottom Layer w0.254: v1(72.136,43.307) v1(72.136,52.451)
NetIC1_35: IC1.35 J7.4 | length 93
  Top Layer w0.254: J7.4 17.907,77.589 v1(17.907,76.327) ; v1(17.78,73.914) 45.313,46.381 89.053,46.381 IC1.35
  Bottom Layer w0.254: v1(17.78,73.914) 17.78,75.09 17.907,75.217 v1(17.907,76.327)
NetIC1_36: IC1.36 R7.1 | length 81.2
  Top Layer w0.254: R7.1 50.927,96.52 v1(56.642,90.805) ; v1(77.089,90.17) 77.155,90.104 77.517,90.104 83.766,83.854 83.766,56.696 IC1.36
  Bottom Layer w0.254: v1@56.515,90.932 v1(56.642,90.805) 76.454,90.805 v1(77.089,90.17)
NetIC1_37: IC1.37 J7.3 | length 91.8
  Top Layer w0.254: J7.3 14.871,78.278 15.26,77.89 15.328,77.89 44.63,48.588 44.704,48.514 81.808,48.514 cw(c82.677,47.625) 83.546,48.514 84.348,48.514 cw(c85.217,47.625) 86.086,48.514 86.888,48.514 cw(c87.757,47.625) 88.626,48.514 89.428,48.514 cw(c90.297,47.625) 91.166,48.514 91.948,48.514 92.022,48.44 IC1.37
NetIC1_38: IC1.38 R8.1 | length 81.4
  Top Layer w0.254: R8.1 44.406,92.711 44.764,92.353 54.078,92.353 v1(56.769,89.662) ; v1(84.836,82.931) 92.837,74.93 IC1.38
  Bottom Layer w0.254: v1@56.642,89.789 v1(56.769,89.662) 56.896,89.535 69.955,89.535 70.104,89.386 70.104,88.919 74.542,84.481 78.059,84.481 79.61,82.931 v1(84.836,82.931)
NetIC1_39: IC1.39 J7.2 | length 93.9
  Top Layer w0.254: J7.2 44.142,45.873 93.625,45.873 IC1.39
NetIC1_40: IC1.40 R9.1 | length 82.2
  Top Layer w0.254: R9.1 54.972,89.681 v1(62.611,82.042) ; v1(94.107,73.787) 95.377,72.517 IC1.40
  Bottom Layer w0.254: v1(62.611,82.042) 62.42,81.852 62.42,79.438 65.05,76.809 91.085,76.809 v1(94.107,73.787)
NetIC1_41: IC1.41 J7.1 | length 95.7
  Top Layer w0.254: J7.1 41.911,45.365 95.657,45.365 IC1.41
NetIC1_42: IC1.42 R10.1 | length 81.1
  Top Layer w0.254: R10.1 55.078,86.273 v1(57.531,83.82) ; v1(97.79,69.215) 97.917,69.088 IC1.42
  Bottom Layer w0.254: v1(57.531,83.82) 57.531,82.55 64.376,75.705 64.376,74.435 64.49,74.321 78.112,74.321 78.213,74.422 80.645,74.422 85.852,69.215 v1(97.79,69.215)
NetIC1_43: IC1.43 J7.6 | length 102.1
  Top Layer w0.254: J7.6 12.216,73.89 12.216,73.313 40.672,44.857 97.689,44.857 IC1.43
NetIC1_44: IC1.44 R11.1 | length 80.6
  Top Layer w0.254: R11.1 60.647,82.863 v1(63.881,79.629) ; v1(91.186,78.232) 100.457,68.961 IC1.44
  Bottom Layer w0.254: v1(63.881,79.629) 64.161,79.349 78.112,79.349 79.229,78.232 v1(91.186,78.232)
NetIC1_45: IC1.45 J7.7 | length 109.6
  Top Layer w0.254: J7.7 10.703,75.673 10.703,73.656 40.01,44.349 99.721,44.349 IC1.45
NetIC1_46: IC1.46 IC3.17 | length 40.6
  Top Layer w0.254: IC1.46 105.664,52.832 109.592,52.832 109.638,52.878 117.09,52.878 117.136,52.832 124.587,52.832 v1(125.476,51.943) ; v1(128.143,51.943) IC3.17
  Bottom Layer w0.254: v1(125.476,51.943) v1(128.143,51.943)
NetIC1_47: IC1.47 IC3.15 | length 57.8
  Top Layer w0.254: IC1.47 109.728,43.434 v1(109.728,40.005) ; v1(111.887,40.005) v1(129.032,40.005) ; v1(138.557,40.005) 139.127,40.005 143.049,43.927 143.049,56.067 IC3.15
  Bottom Layer w0.254: v1(109.728,40.005) v1(111.887,40.005) ; v1(129.032,40.005) v1(138.557,40.005)
NetIC1_48: IC1.48 IC3.16 | length 41.3
  Top Layer w0.254: v1(105.399,53.459) 105.425,53.486 124.306,53.486 v1(124.333,53.513) ; v1(128.143,52.832) 134.212,52.832 134.339,52.705 140.315,52.705 IC3.16
  Bottom Layer w0.254: v1(105.399,53.459) 105.41,53.448 105.41,52.778 105.537,52.651 IC1.48 ; v1(124.333,53.513) 124.333,53.419 124.615,53.137 124.615,53.012 124.795,52.832 v1(128.143,52.832)
NetIC1_49: IC1.49 IC3.14 | length 48.5
  Top Layer w0.254: IC1.49 109.321,48.869 128.711,48.869 129.065,48.514 v1(129.159,48.514) ; IC3.14 144.018,57.638 v1(144.018,48.641)
  Bottom Layer w0.254: v1(129.159,48.514) 135.777,48.514 135.904,48.387 142.429,48.387 142.683,48.641 v1(144.018,48.641)
NetIC1_50: IC1.50 J4.2 | length 33.8
  Bottom Layer w0.254: IC1.50 109.321,51.409 123.089,51.409 124.587,49.911 124.587,44.323 118.872,38.608 118.872,36.971 118.858,36.957 118.858,36.435 J4.2
NetIC1_51: IC1.51 J3.4 | length 63
  Top Layer w0.254: IC1.51 112.014,46.228 v1(112.014,45.339) ; v1(115.824,45.339) 129.899,45.339 130.048,45.19 130.048,27.095 143.891,13.252 J3.4
  Bottom Layer w0.254: v1(112.014,45.339) v1(115.824,45.339)
NetIC1_52: IC1.52 J2.2 | length 45.5
  Bottom Layer w0.254: J2.2 79.502,31.75 79.502,36.427 79.651,36.576 84.709,36.576 87.503,39.37 106.299,39.37 109.321,42.392 109.321,48.869 IC1.52
NetIC1_60: IC1.60 J1.9 | length 127.4
  Top Layer w0.254: J1.9 61.068,118.764 v1(72.136,107.696) ; v1(74.676,107.696) 75.165,107.696 86.461,96.4 86.461,92.883 92.348,86.995 v1(115.697,86.995) ; v1(119.253,86.995) 122.301,86.995 IC1.60
  Bottom Layer w0.254: v1(72.136,107.696) v1(74.676,107.696) ; v1(115.697,86.995) v1(119.253,86.995)
NetIC1_61: IC1.61 J1.4 | length 129
  Top Layer w0.254: J1.4 14.559,117.475 58.779,117.475 58.928,117.326 58.928,109.22 63.119,105.029 v1(64.008,105.029) ; v1(64.008,99.06) 64.094,99.06 71.669,91.486 v1(71.755,91.486) ; v1(84.074,91.186) 92.075,83.185 v1(115.697,83.185)
  Bottom Layer w0.254: v1(64.008,99.06) v1(64.008,105.029) ; v1(71.755,91.486) 77.764,91.486 78.064,91.186 v1(84.074,91.186) ; v1(115.697,83.185) IC1.61
NetIC1_62: IC1.62 J1.7 | length 124.6
  Top Layer w0.254: J1.7 34.495,113.284 43.639,104.14 68.326,104.14 v1(72.517,99.949) ; v1(77.089,99.949) 79.625,97.413 79.625,97.178 82.162,94.641 83.139,94.641 83.973,93.807 83.973,92.83 92.348,84.455 v1(115.697,84.455)
  Bottom Layer w0.254: v1(72.517,99.949) v1(77.089,99.949) ; v1@115.85,84.429 122.327,84.429 IC1.62
NetIC1_63: IC1.63 J1.3 | length 130.6
  Top Layer w0.254: J1.3 11.561,114.654 10.703,113.796 10.703,110.032 20.786,99.949 64.897,99.949 v1(72.517,92.329) ; v1(76.708,92.329) 76.835,92.329 v1(88.519,80.645) ; v1(95.25,80.645) v1(115.697,80.645)
  Bottom Layer w0.254: v1(72.517,92.329) v1(76.708,92.329) ; v1(88.519,80.645) v1(95.25,80.645) ; v1@115.57,80.518 v1(115.697,80.645) IC1.63
NetIC1_64: IC1.64 J1.6 | length 125.9
  Top Layer w0.254: J1.6 13.091,109.391 13.091,108.814 20.158,101.748 65.257,101.748 v1(72.39,94.615) ; v1(76.708,94.615) 76.708,93.726 v1(90.932,79.502) ; v1(96.139,79.502) v1(115.824,79.502)
  Bottom Layer w0.254: v1(72.39,94.615) v1(76.708,94.615) ; v1(90.932,79.502) v1(96.139,79.502) ; v1(115.824,79.502) 115.925,79.401 122.327,79.401 IC1.64
NetIC1_65: IC1.65 IC2.31 | length 37
  Top Layer w0.254: IC2.31 110.49,105.918 v1(114.808,101.6) ; v1(116.967,101.6) 116.967,82.169 IC1.65
  Bottom Layer w0.254: v1@114.681,101.6 v1(114.808,101.6) v1(116.967,101.6)
NetIC1_66: IC1.66 IC2.29 | length 47.3
  Top Layer w0.254: v1(118.745,103.886) 118.745,93.599 118.491,93.345 118.491,83.058 119.608,81.941 121.493,81.941 122.327,81.107 122.327,79.349 IC1.66
  Bottom Layer w0.254: IC2.29 106.605,109.327 106.994,108.938 106.994,108.931 107.292,108.633 107.292,104.184 107.591,103.886 v1(118.745,103.886)
NetIC1_67: IC1.67 IC2.2 | length 93
  Top Layer w0.254: IC2.2 114.808,131.445 133.858,131.445 133.858,125.476 129.54,121.158 v1(129.54,89.027) ; IC1.67 122.301,74.295 129.391,74.295 129.54,74.444 v1(129.54,87.249)
  Bottom Layer w0.254: v1(129.54,87.249) v1(129.54,89.027)
NetIC1_68: IC1.68 IC2.30 | length 44.1
  Top Layer w0.254: IC2.30 107.95,107.315 v1(112.649,102.616) ; v1(117.856,102.616) 117.856,92.456 117.602,92.202 117.602,82.296 120.497,79.401 121.493,79.401 122.327,78.567 122.327,76.809 IC1.68
  Bottom Layer w0.254: v1(112.649,102.616) v1(117.856,102.616)
NetIC1_69: IC1.69 J2.10 | length 61.7
  Top Layer w0.254: J2.10 101.981,33.655 v1(101.981,45.466) ; v1(101.6,69.723) 101.6,59.135 101.727,59.008 v1(101.727,48.514) ; v1(101.6,73.025) IC1.69
  Bottom Layer w0.254: v1(101.6,69.723) v1(101.6,73.025) ; v1(101.727,48.514) 101.727,45.72 v1@101.854,45.593
NetIC1_70: IC1.70 J1.1 | length 125.1
  Top Layer w0.254: J1.1 20.274,103.378 67.691,103.378 v1(72.263,98.806) ; v1(77.089,98.806) 77.089,97.174 98.878,75.385 98.952,75.311 119.728,75.311 119.801,75.237 ; 119.802,75.237 119.844,75.195 ccw(c121.031,75.565) 121.324,74.356 121.353,74.356 121.458,74.356 121.532,74.282 122.028,73.787 122.574,73.787 123.336,73.025 IC1.70
  Bottom Layer w0.254: v1(72.263,98.806) v1(77.089,98.806)
NetIC1_72: IC1.72 J1.2 | length 128.3
  Top Layer w0.254: J1.2 14.756,111.636 14.756,110.734 20.317,105.173 20.317,104.651 v1(20.383,104.584) ; v1(20.447,102.616) 65.786,102.616 v1(72.39,96.012) ; v1(76.708,96.012) 100.939,71.781 122.275,71.781 IC1.72
  Bottom Layer w0.254: v1@20.32,104.648 v1(20.383,104.584) 20.447,104.521 v1(20.447,102.616) ; v1(72.39,96.012) v1(76.708,96.012)
NetIC1_73: IC1.73 J4.3 | length 40.6
  Bottom Layer w0.254: IC1.73 118.745,65.659 118.745,53.87 118.894,53.721 122.047,53.721 127.254,48.514 127.254,42.291 J4.3
NetIC1_74: IC1.74 J2.8 | length 63.7
  Top Layer w0.254: J2.8 99.187,35.941 v1(99.187,43.561) ; v1(99.184,48.257) 99.186,48.259 v1(99.187,63.246) v1(99.187,63.246) ; v1(102.489,63.246) 102.489,68.199 103.479,69.189 122.327,69.189 IC1.74
  Bottom Layer w0.254: v1(99.184,48.257) 99.186,48.256 v1(99.187,43.561) v1(99.187,43.561) ; v1(99.187,63.246) v1(102.489,63.246)
NetIC1_75: IC1.75 J2.9 | length 55.4
  Top Layer w0.254: J2.9 98.544,30.488 100.419,30.488 101.354,31.423 101.354,32.31 104.293,35.249 104.293,48.14 104.394,48.241 v1(104.394,49.276) ; v1(104.267,52.832) 104.267,53.848 v1(107.061,56.642) ; v1(106.934,65.405) IC1.75
  Bottom Layer w0.254: v1(104.267,52.832) 104.267,49.403 v1(104.394,49.276) ; v1(106.934,65.405) 106.934,61.054 107.061,60.927 v1(107.061,56.642)
NetIC1_76: IC1.76 J2.7 | length 65.8
  Top Layer w0.254: J2.7 94.107,33.401 v1(94.107,41.529) ; v1(94.107,48.895) v1(94.107,66.675) ; v1(103.378,66.675) 122.301,66.675 IC1.76
  Bottom Layer w0.254: v1(94.107,41.529) v1(94.107,48.895) ; v1(94.107,66.675) v1(103.378,66.675)
NetIC1_77: IC1.77 J2.3 | length 71.3
  Top Layer w0.254: v1(80.391,43.561) 80.391,33.401 J2.3 ; v1(103.124,62.103) 104.059,63.038 120.858,63.038 IC1.77
  Bottom Layer w0.254: v1(80.391,43.561) 80.391,51.943 82.169,53.721 82.169,62.103 v1(103.124,62.103)
NetIC1_78: IC1.78 J2.6 | length 65.7
  Top Layer w0.254: J2.6 91.567,33.401 v1(91.567,41.529) ; v1(91.567,49.276) 91.567,56.786 91.694,56.913 v1(91.694,64.135) ; v1(103.505,64.135) 122.301,64.135 IC1.78
  Bottom Layer w0.254: v1(91.567,41.529) v1(91.567,49.276) ; v1(91.694,64.135) v1(103.505,64.135)
NetIC1_80: IC1.80 J2.5 | length 64.7
  Top Layer w0.254: J2.5 90.297,34.671 90.297,43.053 v1(96.647,43.053) ; v1(96.52,48.895) 96.621,48.996 96.621,50.627 96.774,50.781 v1(96.774,61.087) ; v1(102.362,61.087) 106.352,61.087 106.833,61.569 122.327,61.569 IC1.80
  Bottom Layer w0.254: v1(96.52,48.895) 96.547,48.868 96.547,48.214 96.647,48.114 v1(96.647,43.053) ; v1(96.774,61.087) v1(102.362,61.087)
NetIC1_81: IC1.81 J2.1 | length 67.9
  Top Layer w0.254: J2.1 77.089,42.545 v1(77.851,43.307) ; v1(79.629,53.213) 80.391,53.975 80.391,57.321 80.855,57.785 v1(82.931,57.785) ; v1(84.455,57.785) v1(89.281,57.785) ; v1(102.87,57.785) IC1.81